# Altium PCB BaseNode.PcbDoc
Units mil, origin at the board's own origin, x right, y up, seen from the top; angles counter-clockwise.
Board outline 1600 x 2300 mil, 2 copper layers (Top Layer, Bottom Layer), stack 65.8 mil thick; 21 components, 38 nets, 113 pads, 0 vias.
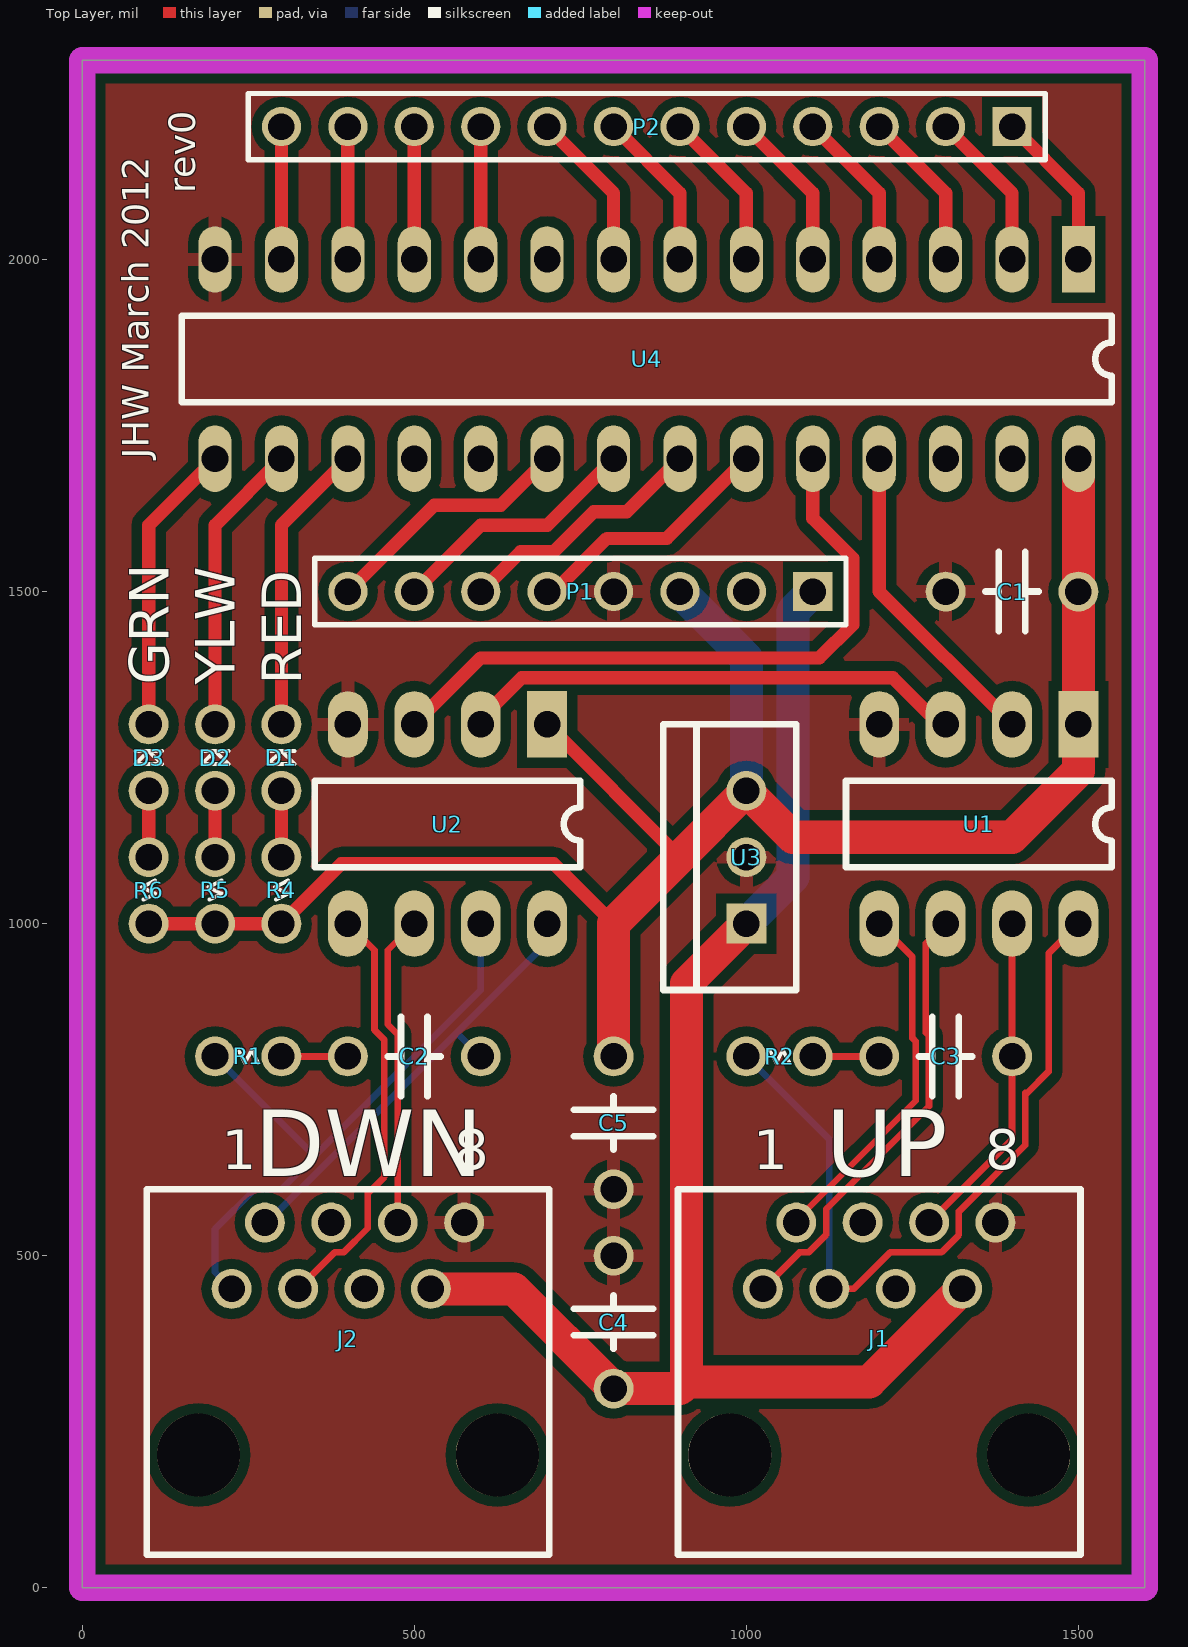
[diagram p0: Top Layer view]
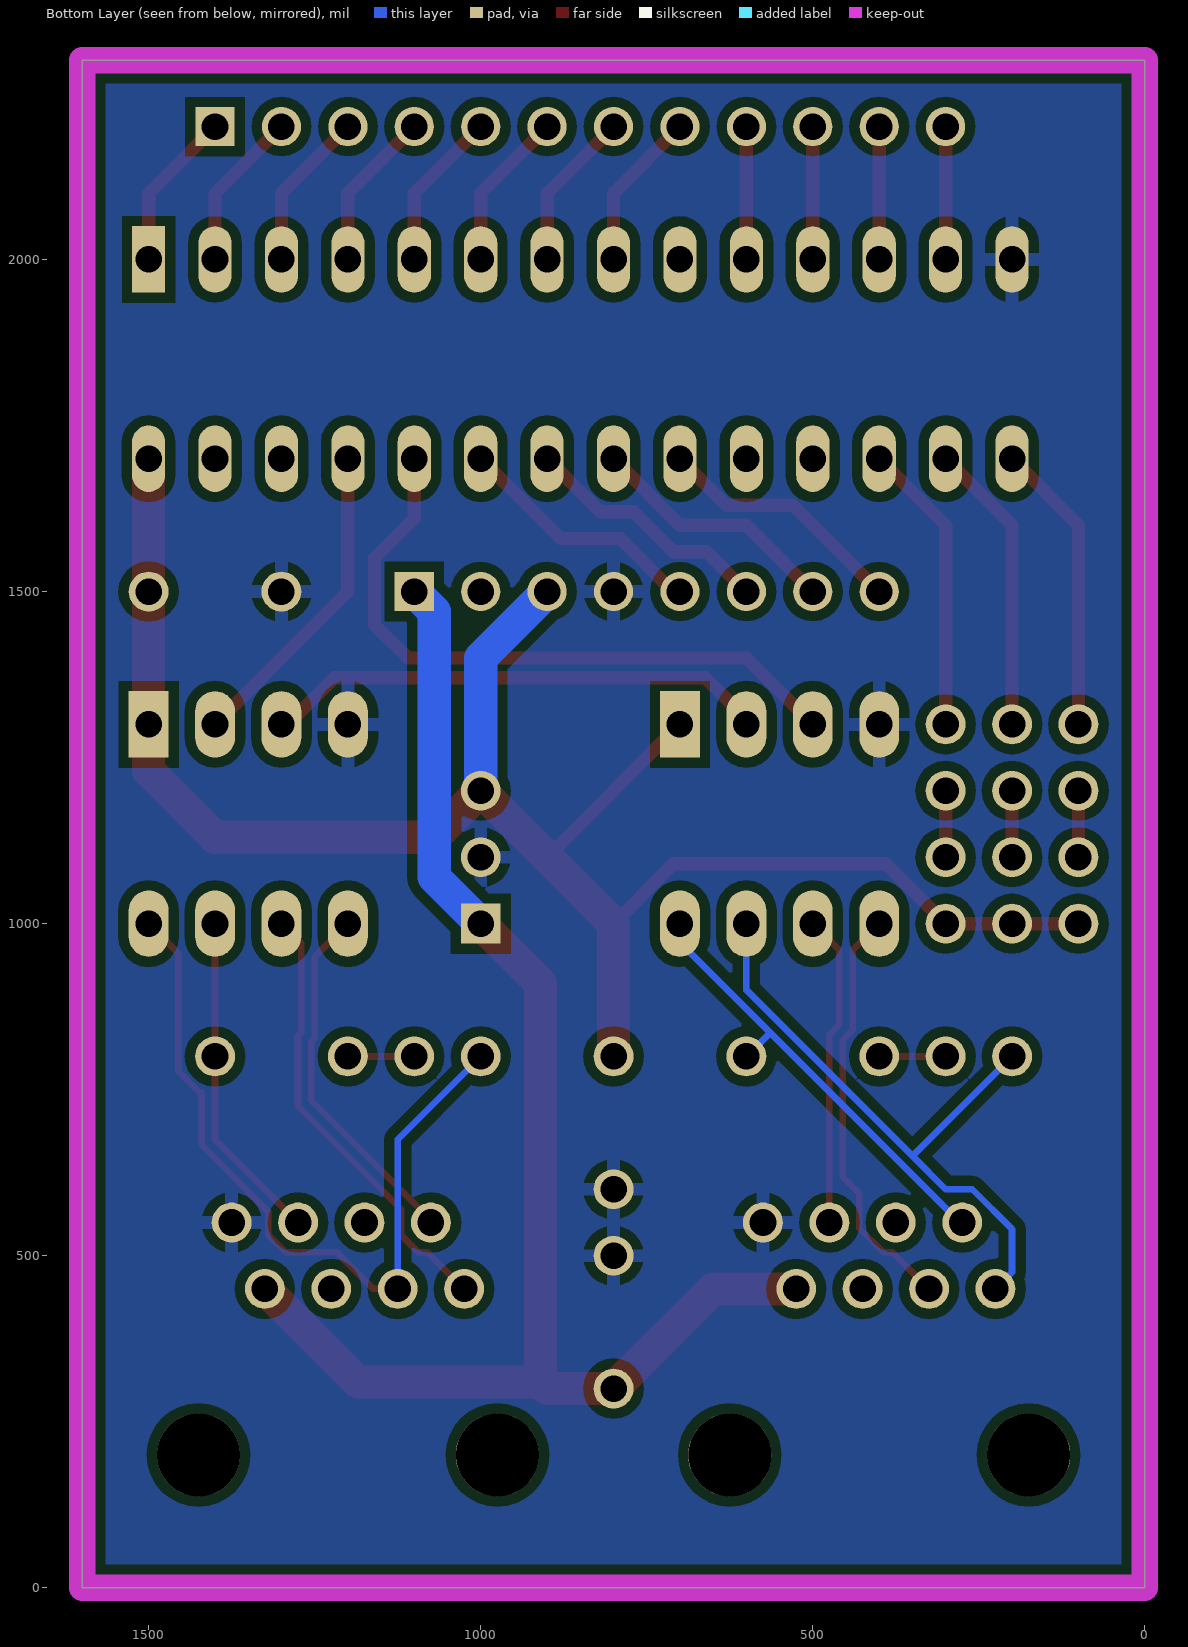
[diagram p1: Bottom Layer view, seen from below]

## Layer stack, top to bottom
Top Layer: signal copper 1.4
Dielectric: core 63, FR-4, Dk 4.8
Bottom Layer: signal copper 1.4

## Board outline
0,0 1600,0 1600,2300 0,2300

## Design rules (kind name [scope] priority, off if disabled: settings)
Clearance POLY-STUFF [inpoly] p1: gap=15
Clearance [All] p2: gap=10
HoleSize [All] p1: absolutevalues=TRUE maxlimit=500 minlimit=10 maxpercent=80.000 minpercent=20.000
PlaneConnect [All] p1: planeconnectstyle=Relief reliefexpansion=20 reliefentries=4 reliefconductorwidth=20 reliefairgap=10
PolygonConnect [All] p1: connectstyle=Relief reliefconductorwidth=20 reliefentries=4 polygonreliefangle="90 Angle"
RoutingVias [All] p1: holewidth=28 width=50 viastyle="Through Hole" minholewidth=28 minwidth=50 maxholewidth=28 maxwidth=50
SilkscreenOverComponentPads [All] p1: minsilkscreentomaskgap=10
SolderMaskExpansion [All] p1: expansion=4
Width [All] p1: maxlimit=100 minlimit=10 preferedwidth=10
25 further rules are at their usual default settings.

## Components (designator, comment, footprint, x,y, rotation, side; value= is the part's Value field where it differs from the comment)
C1 "10uF, 25V" "Capacitor TH 0.2" 1300,1500 r0 top
C2 "10uF, 25V" "Capacitor TH 0.2" 400,800 r0 top
C3 "10uF, 25V" "Capacitor TH 0.2" 1400,800 r180 top
C4 "10uF, 25V" "Capacitor TH 0.2" 800,500 r270 top
C5 "10uF, 25V" "Capacitor TH 0.2" 800,600 r90 top
D1 "WP113IDT" "LED 100mil" 300,1200 r90 top
D2 "WP113YDT" "LED 100mil" 200,1200 r90 top
D3 "WP113GDT" "LED 100mil" 100,1200 r90 top
J1 "SS-6488-NF" SS-6488-NF 1200,200 r0 top
J2 "SS-6488-NF" SS-6488-NF 400,200 r0 top
P1 "Header 8" HDR1X8 1100,1500 r180 top
P2 "Header 12" HDR1X12 1400,2200 r180 top
R1 "120" "Resistor Axial 100mil" 300,800 r180 top
R2 "120" "Resistor Axial 100mil" 1000,800 r0 top
R4 "120" "Resistor Axial 100mil" 300,1100 r270 top
R5 "120" "Resistor Axial 100mil" 200,1100 r270 top
R6 "120" "Resistor Axial 100mil" 100,1100 r270 top
U1 "SN75179BP" dip8 1500,1300 r270 top
U2 "SN75179BP" dip8 700,1300 r270 top
U3 "MC7805CTG" TO-220 1000,1000 r90 top
U4 "CY8C24423-24PI" dip28 1500,2000 r270 top

## Footprints (in the part's own frame and the unit in brackets; to place one, negate y for a bottom-side part, rotate by r counter-clockwise, add the part's x,y. Pads: shape width x height; smd on the part's side, far side on the other; paste and mask are expansions set on the pad)
"Capacitor TH 0.2" [mil]
  round 60 hole 40: 1(0,0) 2(200,0)
  silkscreen extent 60,-60 140,60
dip8 [mil]
  rect 100x60 / inner rect 100x50 / far side rect 100x60 hole 40: 1(0,0)
  oval 100x60 / inner oval 100x50 / far side oval 100x60 hole 40: 2(0,-100) 3(0,-200) 4(0,-300) 5(300,-300) 6(300,-200) 7(300,-100) 8(300,0)
  silkscreen extent 85,-350 215,50
dip28 [mil]
  rect 100x50 hole 40: 1(0,0)
  oval 100x50 hole 40: 2(0,-100) 3(0,-200) 4(0,-300) 5(0,-400) 6(0,-500) 7(0,-600) 8(0,-700) 9(0,-800) 10(0,-900) 11(0,-1000) 12(0,-1100) 13(0,-1200) 14(0,-1300) 15(300,-1300) 16(300,-1200) 17(300,-1100) 18(300,-1000) 19(300,-900) 20(300,-800) 21(300,-700) 22(300,-600) 23(300,-500) 24(300,-400) 25(300,-300) 26(300,-200) 27(300,-100) 28(300,0)
  silkscreen extent 85,-1350 215,50
HDR1X8 [mm] "Connector; Header; 8 Position"
  rect 1.5x1.5 hole 1.016: 1(0,0)
  round 1.5 hole 1.016: 2(2.54,0) 3(5.08,0) 4(7.62,0) 5(10.16,0) 6(12.7,0) 7(15.24,0) 8(17.78,0)
  silkscreen extent -1.27,-1.27 19.05,1.27
HDR1X12 [mm] "Connector; Header; 12 Position"
  rect 1.5x1.5 hole 1.016: 1(0,0)
  round 1.5 hole 1.016: 2(2.54,0) 3(5.08,0) 4(7.62,0) 5(10.16,0) 6(12.7,0) 7(15.24,0) 8(17.78,0) 9(20.32,0) 10(22.86,0) 11(25.4,0) 12(27.94,0)
  silkscreen extent -1.27,-1.27 29.21,1.27
"LED 100mil" [mil] "LED 100mil pitch"
  round 60 hole 40: A(0,0) K(100,0)
  silkscreen extent 40,-20 60,20
"Resistor Axial 100mil" [mil]
  round 60 hole 40: 1(0,0) 2(100,0)
  silkscreen extent 35,-10 64,10
SS-6488-NF [mil] "RJ45"
  round 125 hole 125: 0(-225,0) 0(225,0)
  round 60 hole 40: 1(-175,250) 2(-125,350) 3(-75,250) 4(-25,350) 5(25,250) 6(75,350) 7(125,250) 8(175,350)
  silkscreen extent -303,-150 303,400
TO-220 [mil]
  rect 60x60 hole 40: 1(0,0)
  round 60 hole 40: 2(100,0) 3(200,0)
  silkscreen extent -100,-75 300,125

## Part data
C1 C2 C3 C4 C5: library part Capacitor, "Capacitor"
D1: "LED RECT 2X5MM 625NM RED DIFF"
D2: "LED RECT 2X5MM 588NM YLW DIFF"
D3: "LED RECT 2X5MM 568NM GRN DIFF"
J1 J2: "CONN 8-8 MOD JACK"
P1: "Header, 8-Pin"
P2: "Header, 12-Pin"
R1 R2 R4 R5 R6: library part Resistor, "Resistor"
U1 U2: "IC DIFF DRIVER/RECPAIR 8-DIP"
U3: "IC REG VOLT POS 1A 5V TO220AB"
U4: "IC MCU 4K FLASH 256B 28-DIP"

## Nets (pads, with @x,y where several pads share a name; then routed paths per layer and width w, separated by ;. In a path a pad name is that pad's centre, name@x,y a point inside that pad or via, vN(x,y) a via of type N, cw(c..) or ccw(c..) an arc to the next point about the centre after c; other vN are vias at no path point)
+5V: C1.2 C5.2 P1.3 R4.2 R5.2 R6.2 U1.1 U2.1 U3.3 U4.28 | length 2922.1
  Top Layer w20: R6.2 R5.2 R4.2 390,1090 710,1090 800,1000 ; U2.1 900,1100
  Top Layer w50: C5.2 800,1000 900,1100 U3.3 1070,1130 1400,1130 1500,1230 U1.1 C1.2 U4.28
  Bottom Layer w50: P1.3 1000,1400 U3.3
D: U2.3 U4.24 | length 997
  Top Layer w20: U2.3 600,1400 1110,1400 1160,1450 1160,1550 1100,1610 U4.24
DNRX+: J2.1 R1.2 U2.7 | length 961.6
  Bottom Layer w10: R1.2 350,650 ; J2.1 200,475 200,540 260,600 300,600 350,650 ; U2.7 600,900 350,650
DNRX-: C2.2 J2.2 U2.8 | length 672.8
  Bottom Layer w10: J2.2 278.28,550 700,971.72 U2.8 ; 568.28,831.72 C2.2
DNTX+: J2.3 U2.5 | length 634.6
  Top Layer w10: J2.3 380,505 393.64,505 430,541.36 430,593.64 455,618.64 455,825 440,840 440,960 U2.5
DNTX-: J2.6 U2.6 | length 472.8
  Top Layer w10: J2.6 475,833.28 460,848.28 460,960 U2.6
GND: C1.1 C4.1 C5.1 J1.8 J2.8 P1.4 U1.4 U2.4 U3.2 U4.14
NetC2_1: C2.1 R1.1 | length 100
  Top Layer w10: R1.1 C2.1
NetC3_2: C3.2 R2.2 | length 100
  Top Layer w10: R2.2 C3.2
NetD1_A: D1.A R4.1 | length 100
  Top Layer w20: R4.1 D1.A
NetD1_K: D1.K U4.17 | length 441.4
  Top Layer w20: D1.K 300,1600 U4.17
NetD2_A: D2.A R5.1 | length 100
  Top Layer w20: R5.1 D2.A
NetD2_K: D2.K U4.16 | length 441.4
  Top Layer w20: D2.K 200,1600 U4.16
NetD3_A: D3.A R6.1 | length 100
  Top Layer w20: R6.1 D3.A
NetD3_K: D3.K U4.15 | length 441.4
  Top Layer w20: D3.K 100,1600 U4.15
NetP1_5: P1.5 U4.23 | length 382.8
  Top Layer w20: P1.5 710,1500 790,1580 880,1580 U4.23
NetP1_6: P1.6 U4.22 | length 382.8
  Top Layer w20: P1.6 660,1560 710,1560 770,1620 820,1620 U4.22
NetP1_7: P1.7 U4.21 | length 382.8
  Top Layer w20: P1.7 600,1600 700,1600 U4.21
NetP1_8: P1.8 U4.20 | length 382.8
  Top Layer w20: P1.8 530,1630 630,1630 U4.20
NetP2_1: P2.1 U4.1 | length 241.4
  Top Layer w20: P2.1 1500,2100 U4.1
NetP2_2: P2.2 U4.2 | length 241.4
  Top Layer w20: P2.2 1400,2100 U4.2
NetP2_3: P2.3 U4.3 | length 241.4
  Top Layer w20: P2.3 1300,2100 U4.3
NetP2_4: P2.4 U4.4 | length 241.4
  Top Layer w20: P2.4 1200,2100 U4.4
NetP2_5: P2.5 U4.5 | length 241.4
  Top Layer w20: P2.5 1100,2100 U4.5
NetP2_6: P2.6 U4.6 | length 241.4
  Top Layer w20: P2.6 1000,2100 U4.6
NetP2_7: P2.7 U4.7 | length 241.4
  Top Layer w20: P2.7 900,2100 U4.7
NetP2_8: P2.8 U4.8 | length 241.4
  Top Layer w20: P2.8 800,2100 U4.8
NetP2_9: P2.9 U4.10 | length 200
  Top Layer w20: U4.10 P2.9
NetP2_10: P2.10 U4.11 | length 200
  Top Layer w20: U4.11 P2.10
NetP2_11: P2.11 U4.12 | length 200
  Top Layer w20: U4.12 P2.11
NetP2_12: P2.12 U4.13 | length 200
  Top Layer w20: U4.13 P2.12
NetU1_3: U1.3 U2.2 | length 754.6
  Top Layer w20: U2.2@600,1308.28 661.72,1370 1220.71,1370 1290.71,1300 U1.3
R: U1.2 U4.25 | length 482.8
  Top Layer w20: U4.25 1200,1500 U1.2
UPRX+: J1.3 R2.1 U1.8 | length 1175.3
  Top Layer w10: J1.3 1161.36,450 1216.36,505 1293.64,505 1320,531.36 1320,566.72 1420,666.72 1420,745 1422.78,745 1455,777.22 1455,955 U1.8
  Bottom Layer w10: R2.1 1125,675 J1.3
UPRX-: C3.1 J1.6 U1.7 | length 501.8
  Top Layer w10: J1.6 1400,675 C3.1 U1.7
UPTX+: J1.1 U1.6 | length 676
  Top Layer w10: J1.1 1080,505 1093.64,505 1120,531.36 1120,570 1275,725 1275,831.07 1270,836.07 1270,970 U1.6
UPTX-: J1.2 U1.5 | length 547.3
  Top Layer w10: J1.2 1075,553.28 1255,733.28 1255,822.78 1250,827.78 1250,950 U1.5
V_IN: C4.2 J1.7 J2.7 P1.1 U3.1 | length 2193
  Top Layer w50: J2.7 650,450 C4.2 900,300 910,310 ; U3.1 910,910 910,310 ; J1.7 1185,310 910,310
  Bottom Layer w50: U3.1 1070,1070 1070,1470 P1.1
pads on no net: J1.0 J1.4 J1.5 J2.0 J2.4 J2.5 P1.2 U4.9 U4.18 U4.19 U4.26 U4.27

## Polygon pours and split planes (outlines as drawn)
GND on Bottom Layer "GND" (solid, pour order 2): 0,0 1600,0 1600,2300 0,2300
GND on Top Layer "GND" (solid, pour order 4): 0,0 1600,0 1600,2300 0,2300

## Keep-outs
Keep-Out Layer:
  the board outline again, w40

## Silkscreen, mask and mechanical layers (free items; w line width, h text height)
Top Overlay:
  text "rev0" at 170,2100 h40 r90
  text "JHW March 2012" at 100,1700 h40 r90
  text "GRN" at 130,1360 h60 r90
  text "YLW" at 230,1360 h60 r90
  text "RED" at 330,1360 h60 r90
  text "DWN" at 260,620 h100
  text "UP" at 1120,620 h100
Outline:
  the board outline again, w10

## Text inside footprints (layer, text, board x,y; h text height)
J1: Top Overlay "1" at 1010,630 h60; Top Overlay "8" at 1360,630 h60
J2: Top Overlay "1" at 210,630 h60; Top Overlay "8" at 560,630 h60